# Altium PCB Dentist_camera_extender_board_pcb_4.PcbDoc
Units mm, origin at the board's own origin, x right, y up, seen from the top; angles counter-clockwise.
Board outline 45 x 34.5 mm, 2 copper layers (Top Layer, Bottom Layer); 6 components, 36 nets, 41 pads, 4 vias.
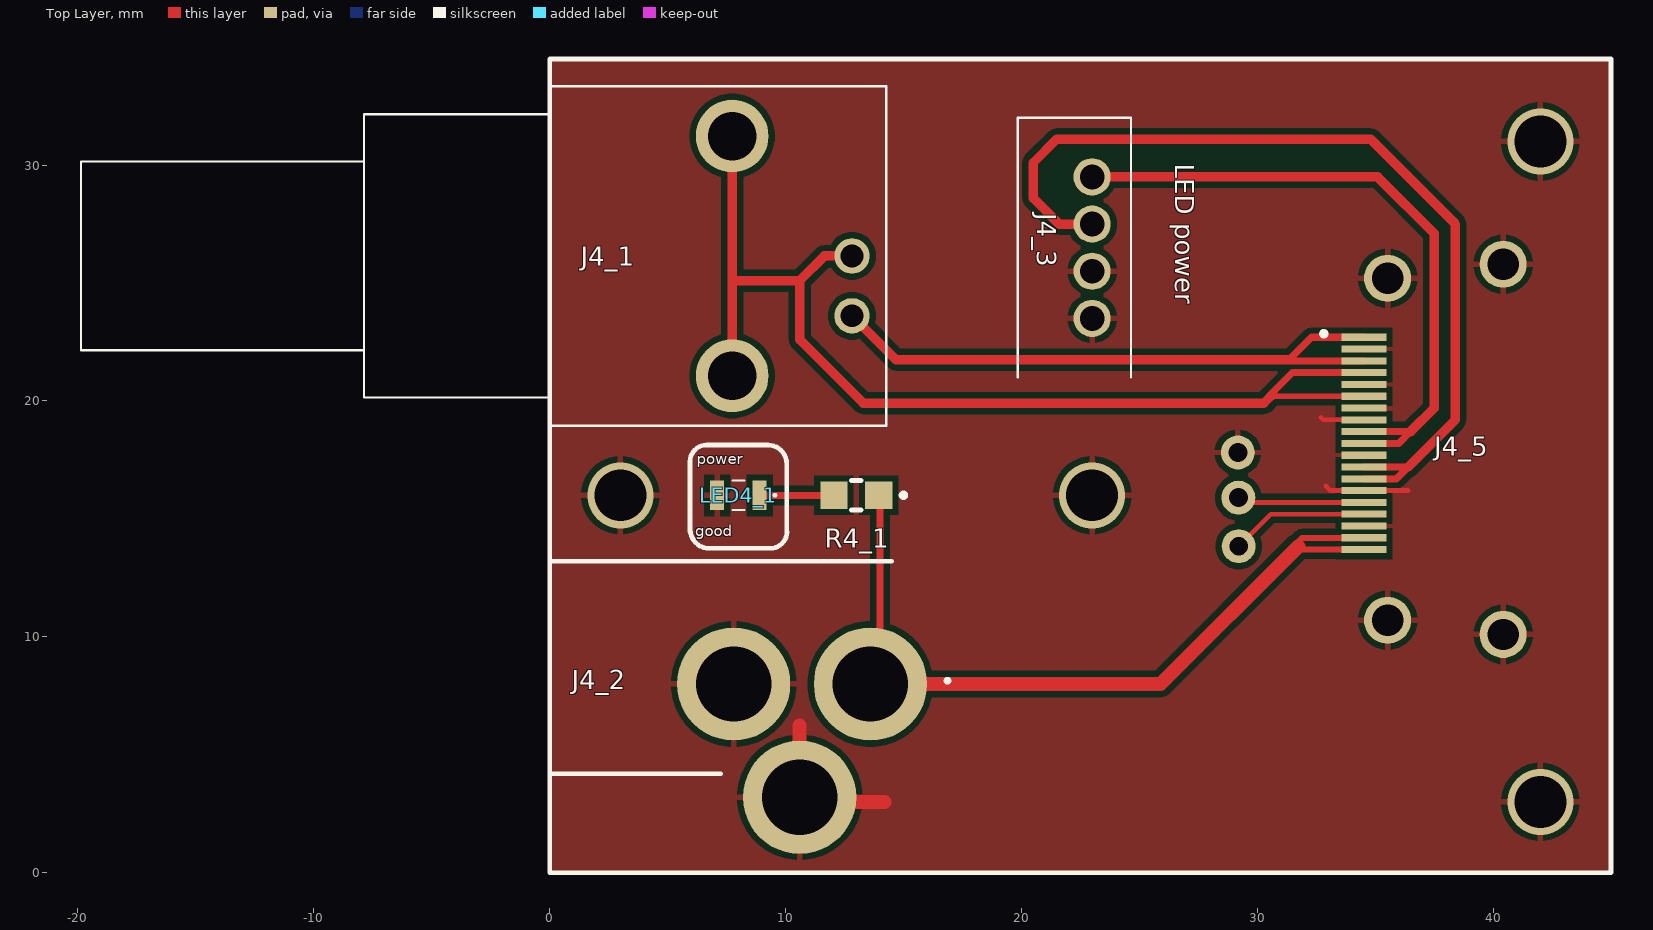
[diagram p0: Top Layer view]
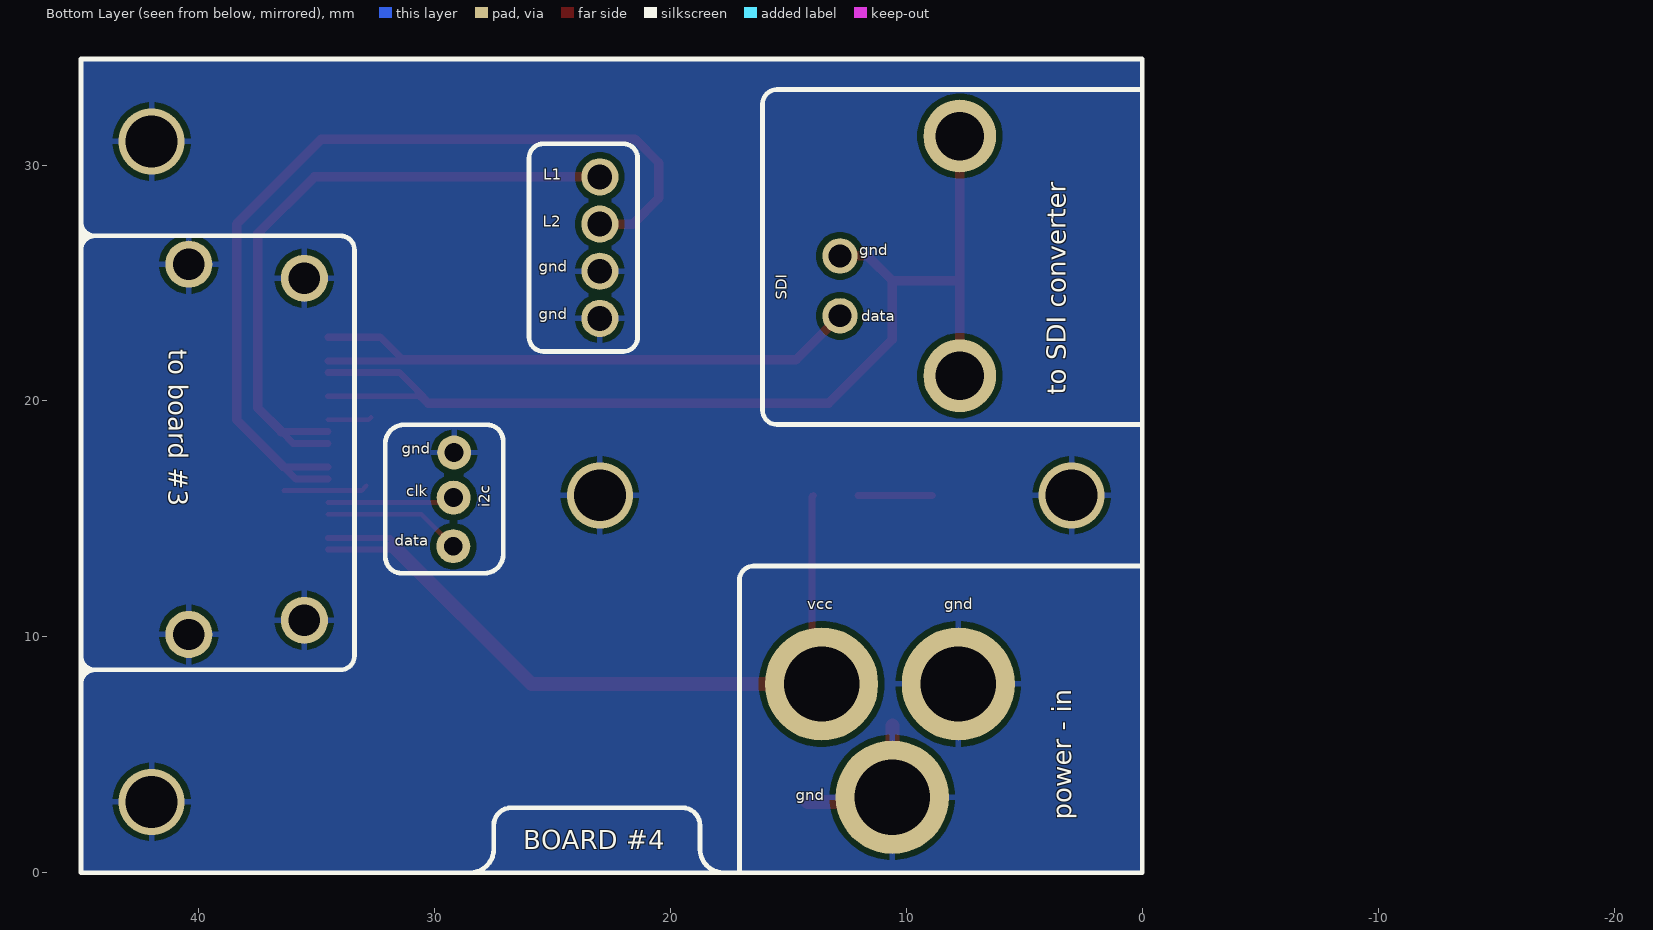
[diagram p1: Bottom Layer view, seen from below]

## Layer stack, top to bottom
Top Solder: solder mask 0.0102, Solder Resist, Dk 3.5
Top Layer: signal copper 0.0356
Dielectric 1: dielectric 0.32, FR-4, Dk 4.8
Bottom Layer: signal copper 0.0356
Bottom Solder: solder mask 0.0102, Solder Resist, Dk 3.5

## Board outline
0,0 0,34.5 45,34.5 45,0

## Design rules (kind name [scope] priority, off if disabled: settings)
Clearance [All] p1: gap=0.254 ignorepadtopadclearanceinfootprint=FALSE except(0: Arc-Hole Track-Hole SMDPad-Hole THPad-Hole Via-Hole Fill-Hole Poly-Hole Region-Hole Text-Hole; 0.2: Arc-Arc Arc-Track Arc-SMDPad Track-Track Track-SMDPad SMDPad-SMDPad)
PolygonConnect [All] p1: connectstyle=Relief reliefconductorwidth=0.254 reliefentries=4 polygonreliefangle="90 Angle" airgapwidth=0.254
RoutingVias [All] p1: holewidth=0.711 width=1.27 viastyle="Through Hole" minholewidth=0.711 minwidth=1.27 maxholewidth=0.711 maxwidth=1.27
SolderMaskExpansion [All] p1: expansion=0.102 istentingtop=FALSE
Width [All] p1: maxlimit=1 minlimit=0.2 preferedwidth=0.2 minimp=50.000000 maximp=50.000000 favimp=50.000000
30 further rules are at their usual default settings.

## Classes and differential pairs
component class Dentist_camera_extender_schematic_sch_4: J4_1 J4_2 LED4_1 R4_1

## Components (designator, comment, footprint, x,y, rotation, side; value= is the part's Value field where it differs from the comment)
J4_1 "031-5637" 0315637 12.818,23.609 r90 top locked
J4_2 "POWER_IN" 694106301002_1 0,4.2 r0 top locked
J4_3 "LED power" B04BJWPFSKRLFSN 23,23.5 r90 top (schematic designator J3_3)
J4_5 "Sig_out" 10029449001RLF 38.375,18.2 r90 top locked (schematic designator J3_5)
LED4_1 "Green" 1721SYGCS530E2TR8 8,16 r0 top
R4_1 "1k" ERA6AEB1020V 13,16 r180 top

## Footprints (in the part's own frame and the unit in brackets; to place one, negate y for a bottom-side part, rotate by r counter-clockwise, add the part's x,y. Pads: shape width x height; smd on the part's side, far side on the other; paste and mask are expansions set on the pad)
1721SYGCS530E2TR8 [mm]
  rect 0.6x1.25 smd: 1(0.9,0) 2(-0.9,0)
  silkscreen extent -0.25,-0.63 1.6,0.63, body extent -1,-0.63 1,0.63, height 1
0315637 [mm]
  round 1.501 hole 0.965: 1(0,0) 2(2.54,0)
  round 3.085 hole 2.057: MH1(-2.54,5.08) MH2(7.62,5.08)
  silkscreen extent -4.66,-1.45 9.74,32.69, body extent -4.7,-1.56 9.7,33.85, height 12.98
10029449001RLF [mm]
  rect 0.3x1.9 smd: 1(4.499,3.85) 2(3.999,3.85) 3(3.499,3.85) 4(2.999,3.85) 5(2.499,3.85) 6(1.999,3.85) 7(1.499,3.85) 8(0.999,3.85) 9(0.499,3.85) 10(-0.001,3.85) 11(-0.501,3.85) 12(-1.001,3.85) 13(-1.501,3.85) 14(-2.001,3.85) 15(-2.501,3.85) 16(-3.001,3.85) 17(-3.501,3.85) 18(-4.001,3.85) 19(-4.501,3.85)
  round 1.995 hole 1.33: MH1(-7.501,2.85) MH2(6.999,2.85) MH3(-8.101,-2.05) MH4(7.599,-2.05)
  silkscreen extent 4.6,5.5 4.7,5.6, body extent -8.35,-5.6 7.85,4.25, height 6.03
694106301002_1 [mm]
  round 4.8 hole 3.2: 1(13.6,3.8) 2(7.8,3.8) 3(10.6,-1)
  silkscreen extent 0,0 16.93,9, body extent 0.12,-1.22 14.62,8.28, height 11.02
B04BJWPFSKRLFSN [mm]
  round 1.575 hole 1.05: 1(0,0) 2(2,0) 3(4,0) 4(6,0)
  silkscreen extent -2.5,-1.65 8.5,3.15, body extent -3.26,-2.67 9.14,3.08, height 7
ERA6AEB1020V [mm]
  rect 1.15x1.15 smd: 1(-0.95,0) 2(0.95,0)
  silkscreen extent -2.1,-0.63 0.2,0.63, body extent -1,-0.63 1,0.63, height 0.5

## Part data
J4_1: "Connector", Manufacturer_Name=Amphenol, Mouser Part Number=523-31-5637, Arrow Part Number=031-5637, Arrow Price/Stock=https://www.arrow.com/en/products/031-5637/amphenol-rf, Datasheet Link=https://datasheet.datasheetarchive.com/originals/distributors/Datasheets-DGA15/760804.pdf, Manufacturer_Part_Number=031-5637, Mouser Price/Stock=https://www.mouser.co.uk/ProductDetail/Amphenol-RF/031-5637/?qs=%2FrA2Kvb8OYb4YSYQEIM5Nw%3D%3D
J4_2: library part 694106301002, "694106301002", Manufacturer_Name="Wurth Elektronik", Mouser Part Number=710-694106301002, Datasheet Link=https://datasheet.datasheetarchive.com/originals/distributors/Datasheets_SAMA/1c153bd2ba42bb51bda59ee4cd9765cd.pdf, Manufacturer_Part_Number=694106301002, Mouser Price/Stock=https://www.mouser.co.uk/ProductDetail/Wurth-Elektronik/694106301002?qs=a9WhcLg8qCwOEkcI62k5mA%3D%3D
J4_3: library part B04B-JWPF-SK-R_LF__SN_, "Connector", Manufacturer_Name="JST (JAPAN SOLDERLESS TERMINALS)", Manufacturer_Part_Number=B04B-JWPF-SK-R(LF)(SN), Datasheet Link=https://componentsearchengine.com/Datasheets/2/B04B-JWPF-SK-R(LF)(SN).pdf, Height=16.6mm
J4_5: library part 10029449-001RLF, "10029449-001RLF", Manufacturer_Name=Amphenol, Mouser Part Number=649-10029449-001RLF, Arrow Part Number=10029449-001RLF, Arrow Price/Stock=https://www.arrow.com/en/products/10029449-001rlf/amphenol-fci?region=nac, Datasheet Link=https://cdn.amphenol-icc.com/media/wysiwyg/files/drawing/10029449.pdf, Height=6.3mm, Manufacturer_Part_Number=10029449-001RLF, Mouser Price/Stock=https://www.mouser.co.uk/ProductDetail/Amphenol-FCI/10029449-001RLF?qs=D%252By4jQJzx8L60NhBOOKSqQ%3D%3D
LED4_1: library part 17-21SYGC_S530-E2_TR8, "LED", Arrow Part Number=17-21SYGC/S530-E2/TR8, Manufacturer_Name=Everlight, Mouser Part Number=638-1721SYGCS530E2, Arrow Price/Stock=https://www.arrow.com/en/products/17-21sygcs530-e2tr8/everlight-electronics?region=nac, Datasheet Link=https://media.digikey.com/pdf/Data%20Sheets/Everlight%20PDFs/17-21SYGC,S530-E2,TR8.pdf, Height=1.1mm, Manufacturer_Part_Number=17-21SYGC/S530-E2/TR8, Mouser Price/Stock=https://www.mouser.co.uk/ProductDetail/Everlight/17-21SYGC-S530-E2-TR8?qs=8PzhAHr7IdMM%252BF4DSbsAKQ%3D%3D
R4_1: library part ERA6ARB103V, "ERA6ARB103V", Manufacturer_Name=Panasonic, Arrow Part Number=ERA6ARB103V, Arrow Price/Stock=https://www.arrow.com/en/products/era-6arb103v/panasonic, Datasheet Link=https://industrial.panasonic.com/cdbs/www-data/pdf/RDM0000/AOA0000C307.pdf, Height=0.6mm, Manufacturer_Part_Number=ERA6ARB103V

## Free pads (board coordinates)
  round 1.44 hole 0.8: 13(29.213,13.841) 14(29.176,17.814) 14(29.2,15.9)

## Via types
v1: diameter 2.8, hole 2.2, Top Layer to Bottom Layer, 4 vias

## Nets (pads, with @x,y where several pads share a name; then routed paths per layer and width w, separated by ;. In a path a pad name is that pad's centre, name@x,y a point inside that pad or via, vN(x,y) a via of type N, cw(c..) or ccw(c..) an arc to the next point about the centre after c; other vN are vias at no path point)
GND: J4_2.2 J4_2.3 J4_3.1 J4_3.2 J4_5.2 J4_5.5 J4_5.7 J4_5.8 J4_5.11 J4_5.14 J4_5.17 J4_5.MH1 J4_5.MH2 J4_5.MH3 J4_5.MH4 LED4_1.2 pad.14@29.176,17.814 | length 12.2
  Top Layer w0.2: 32.7,19.3 32.801,19.199 J4_5.8 ; 32.9,16.4 33.101,16.199 J4_5.14 36.399,16.199 36.4,16.2
  Top Layer w0.6: 10.6,6.231 J4_2.3 10.8,3 14.197,3
  other v1: 42,3 3,16 23,16 42,31
GND_SDI: J4_1.2 J4_1.MH1 J4_1.MH2 J4_5.4 J4_5.6 | length 48.1
  Top Layer w0.254: 30.5,20.2 30.501,20.199 J4_5.6
  Top Layer w0.3: 30.5,20.2 31.076,20.776 31.499,21.199 J4_5.4
  Top Layer w0.4: J4_1.MH1 7.738,25.1 ; J4_1.MH2 7.738,25.1 ; J4_1.2@12.818,26.08 J4_1.2@13.08,26.08 ; J4_1.2 11.649,26.149 10.6,25.1 ; 30.576,20.199 30.277,19.9 13.3,19.9 10.6,22.6 10.6,25.1 ; 7.738,25.1 10.6,25.1
NetD1_1: 
NetD2_1: 
NetJ1_1: 
NetJ1_2: 
NetJ1_3: 
NetJ1_4: 
NetJ1_5: 
NetJ1_6: 
NetJ1_7: 
NetJ1_8: 
NetJ1_9: 
NetJ1_10: 
NetJ1_11: 
NetJ1_12: 
NetJ1_13: 
NetJ1_14: 
NetJ1_15: 
NetJ1_16: 
NetJ1_17: 
NetJ1_18: 
NetJ1_19: 
NetJ1_20: 
NetJ1_21: 
NetJ1_22: 
NetJ1_23: 
NetJ1_24: 
NetJ2_1_13: J4_3.3 J4_5.12 J4_5.13 | length 39.3
  Top Layer w0.3: J4_5.13 35.899,16.699 36.399,17.199 J4_5.12
  Top Layer w0.4: J4_3.3 21.6,27.5 20.5,28.6 20.5,30.1 21.5,31.1 34.8,31.1 38.4,27.5 38.4,19.2 36.399,17.199
NetJ2_1_28: J4_3.4 J4_5.9 J4_5.10 | length 28.5
  Top Layer w0.3: J4_5.10 35.999,18.199 36.499,18.699 J4_5.9
  Top Layer w0.4: J4_3.4 35.1,29.5 37.5,27.1 37.5,19.7 36.499,18.699
NetJ3_1_2: J4_1.1 J4_5.1 J4_5.3 | length 26.2
  Top Layer w0.3: 31.349,21.799 31.449,21.699 ; 31.399,21.799 32.299,22.699 J4_5.1 ; 31.449,21.749 31.449,21.699 ; J4_5.3 31.449,21.699
  Top Layer w0.4: J4_1.1 14.678,21.749 31.449,21.749
NetJ3_4_1: J4_5.16 pad.13 | length 5.9
  Top Layer w0.2: pad.13 30.571,15.199 J4_5.16
NetJ3_4_2: J4_5.15 pad.14@29.2,15.9 | length 5.6
  Top Layer w0.2: pad.14@29.2,15.699 pad.14@29.401,15.699 ; pad.14@29.2,15.9 pad.14@29.401,15.699 ; J4_5.15 pad.14@29.401,15.699
NetLED3_1_1: 
NetLED4_1_1: LED4_1.1 R4_1.2 | length 3.1
  Top Layer w0.3: LED4_1.1 R4_1.2
VCC_SDI: J4_2.1 J4_5.18 J4_5.19 R4_1.1 | length 34.7
  Top Layer w0.254: 31.687,13.987 31.899,14.199 J4_5.18 ; 31.875,13.725 31.901,13.699 J4_5.19
  Top Layer w0.3: J4_2.1 13.8,8.2 J4_2.1@14,8.4 ; R4_1.1 14,15.95 J4_2.1@14,8.4 ; J4_2.1@14,8 J4_2.1@14,8.4
  Top Layer w0.6: J4_2.1 14,8 25.9,8 31.735,13.835

## Polygon pours and split planes (outlines as drawn)
GND on Top Layer "GND_L01_P000" (solid, remove dead copper, pour order 0): 0,0 0,34.5 45,34.5 45,0
GND on Bottom Layer "GND_L02_P001" (solid, remove dead copper, pour order 1): 0,0 0,34.5 45,34.5 45,0

## Silkscreen, mask and mechanical layers (free items; w line width, h text height)
Top Overlay:
  lines w0.2: 5.954,14.466 5.954,17.431 cw(c6.654,17.431) 6.654,18.131 9.254,18.131 cw(c9.254,17.331) 10.054,17.331 10.054,14.366 ; 5.959,14.55 ccw(c6.759,14.55) 6.759,13.75 9.359,13.75 ccw(c9.359,14.45) 10.059,14.45 ; 0,0 45,0 45,34.5 0,34.5 0,0 ; 5.954,13.204 ccw(c5.954,13.204) 5.954,13.204
  text "LED power" at 26.521,30.046 h0.8 r270
  text "power" at 6.244,17.145 h0.8
  text "good" at 6.182,14.1 h0.8
Bottom Overlay:
  lines w0.2: 0,13 16.483,13 cw(c16.483,12.4) 17.083,12.4 17.083,12.1 17.083,10.7 17.083,0 ; 0.017,19 15.5,19 ccw(c15.5,19.6) 16.1,19.6 16.1,30.9 16.1,32.3 16.1,32.6 ccw(c15.5,32.6) 15.5,33.2 0.017,33.2 ; 44.7,8.6 44.8,8.6 ; 44.7,27 44.8,27 ; 44.75,8.6 44.8,8.6 ; 44.75,27 44.8,27 ; 45,8 ccw(c44.4,8) 44.4,8.6 ; 45,8.4 ccw(c44.8,8.4) 44.8,8.6 ; 45,8.8 cw(c44.8,8.8) 44.8,8.6 ; 45,9.2 cw(c44.4,9.2) 44.4,8.6 ; 45,26.4 ccw(c44.4,26.4) 44.4,27 ; 45,26.8 ccw(c44.8,26.8) 44.8,27 ; 45,27.2 cw(c44.8,27.2) 44.8,27 ; 44.4,8.6 ccw(c44.4,8.6) 44.4,8.6 ; 44.4,8.6 34,8.6 cw(c34,9.2) 33.4,9.2 33.4,9.5 33.4,24.7 33.4,26.1 33.4,26.4 cw(c34,26.4) 34,27 44.4,27 ; 44.4,27 ccw(c44.4,27) 44.4,27 ; 44.4,27 ccw(c44.4,27.6) 45,27.6 cw(c44.4,27.6) 44.4,27 ; 0,0 45,0 45,34.5 0,34.5 0,0 ; 17.75,0 ccw(c17.75,1) 18.75,1 18.75,2 cw(c19.5,2) 19.5,2.75 26.75,2.75 cw(c26.75,2) 27.5,2 27.5,1 ccw(c28.5,1) 28.5,0 17.75,0 ; 21.4,22.7 ccw(c22,22.7) 22,22.1 23.4,22.1 25.4,22.1 ccw(c25.4,22.7) 26,22.7 26,23 26,30 26,30.3 ccw(c25.4,30.3) 25.4,30.9 23.4,30.9 22,30.9 ccw(c22,30.3) 21.4,30.3 21.4,30 21.4,23 21.4,22.7 ; 27.096,13.493 ccw(c27.896,13.493) 27.896,12.693 31.396,12.693 ccw(c31.396,13.393) 32.096,13.393 32.096,18.193 ccw(c31.296,18.193) 31.296,18.993 27.796,18.993 ccw(c27.796,18.293) 27.096,18.293 27.096,13.493
  text "L1" at 25.4,29.2 h0.8
  text "L2" at 25.415,27.209 h0.8
  text "gnd" at 12,26 h0.8
  text "gnd" at 25.6,25.3 h0.8
  text "SDI" at 14.9,24.3 h0.8 r270
  text "gnd" at 25.6,23.3 h0.8
  text "data" at 11.918,23.217 h0.8
  text "to board #3" at 41.271,22.196 h0.8 r90
  text "to SDI converter" at 3.254,20.254 h0.8 r270
  text "gnd" at 31.4,17.6 h0.8
  text "clk" at 31.2,15.8 h0.8
  text "i2c" at 27.5,15.5 h0.8 r270
  text "data" at 31.7,13.7 h0.8
  text "gnd" at 8.4,11 h0.8
  text "vcc" at 14.2,11 h0.8
  text "gnd" at 14.7,2.9 h0.8
  text "power - in" at 3.021,2.254 h0.8 r270
  text "BOARD #4" at 26.246,1.004 h0.8